# EAGLE board RefOsc10MHz_1V3 (EAGLE 7.2.0)
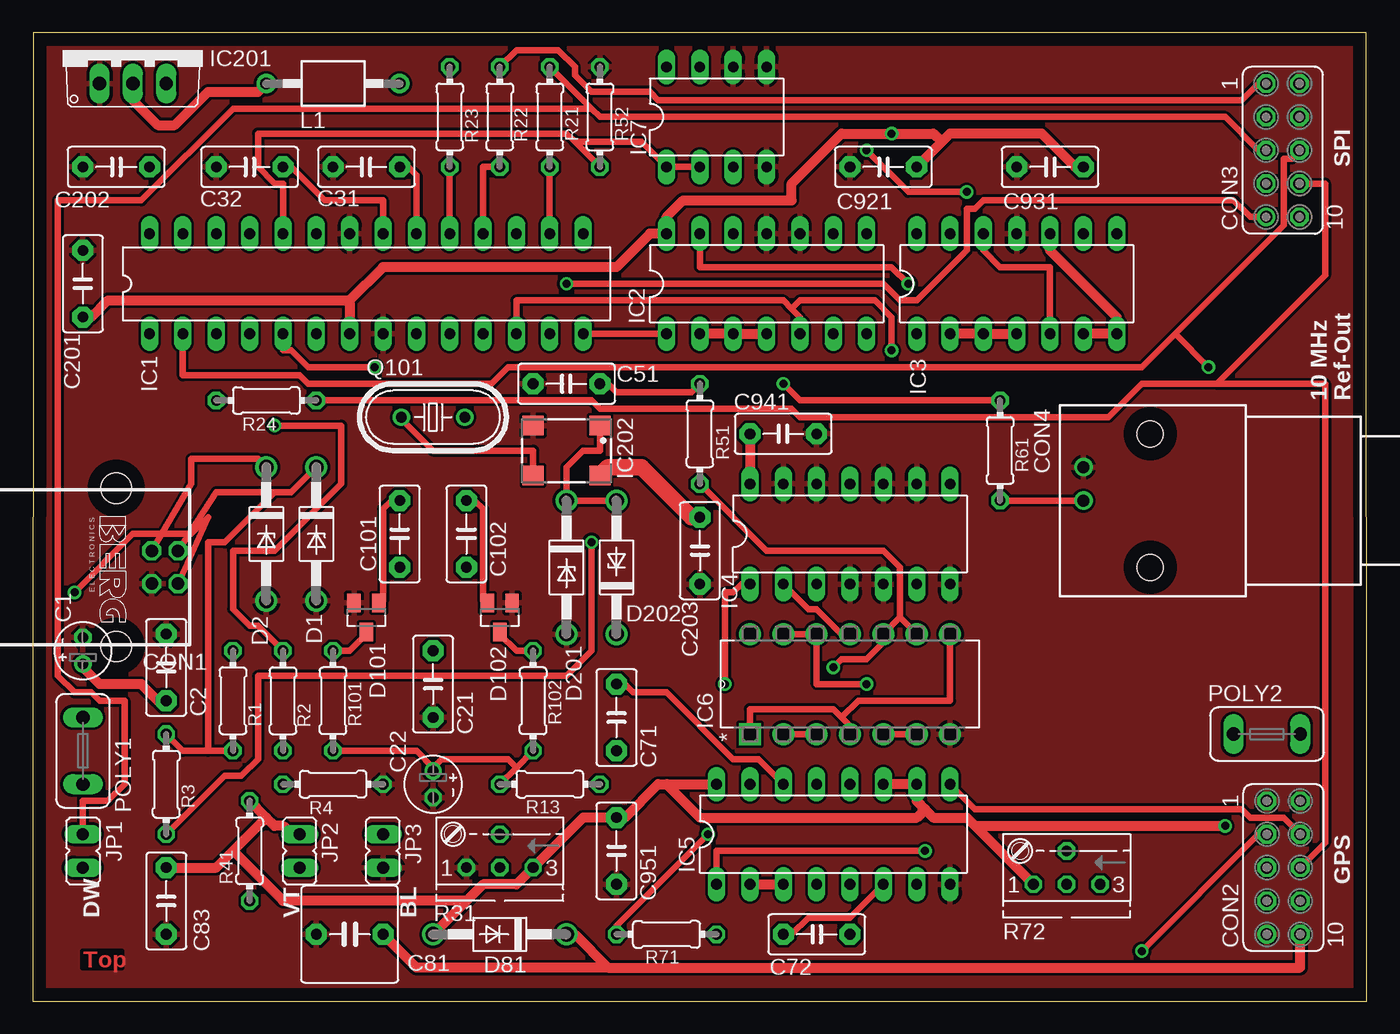
[diagram p0: board, top side]
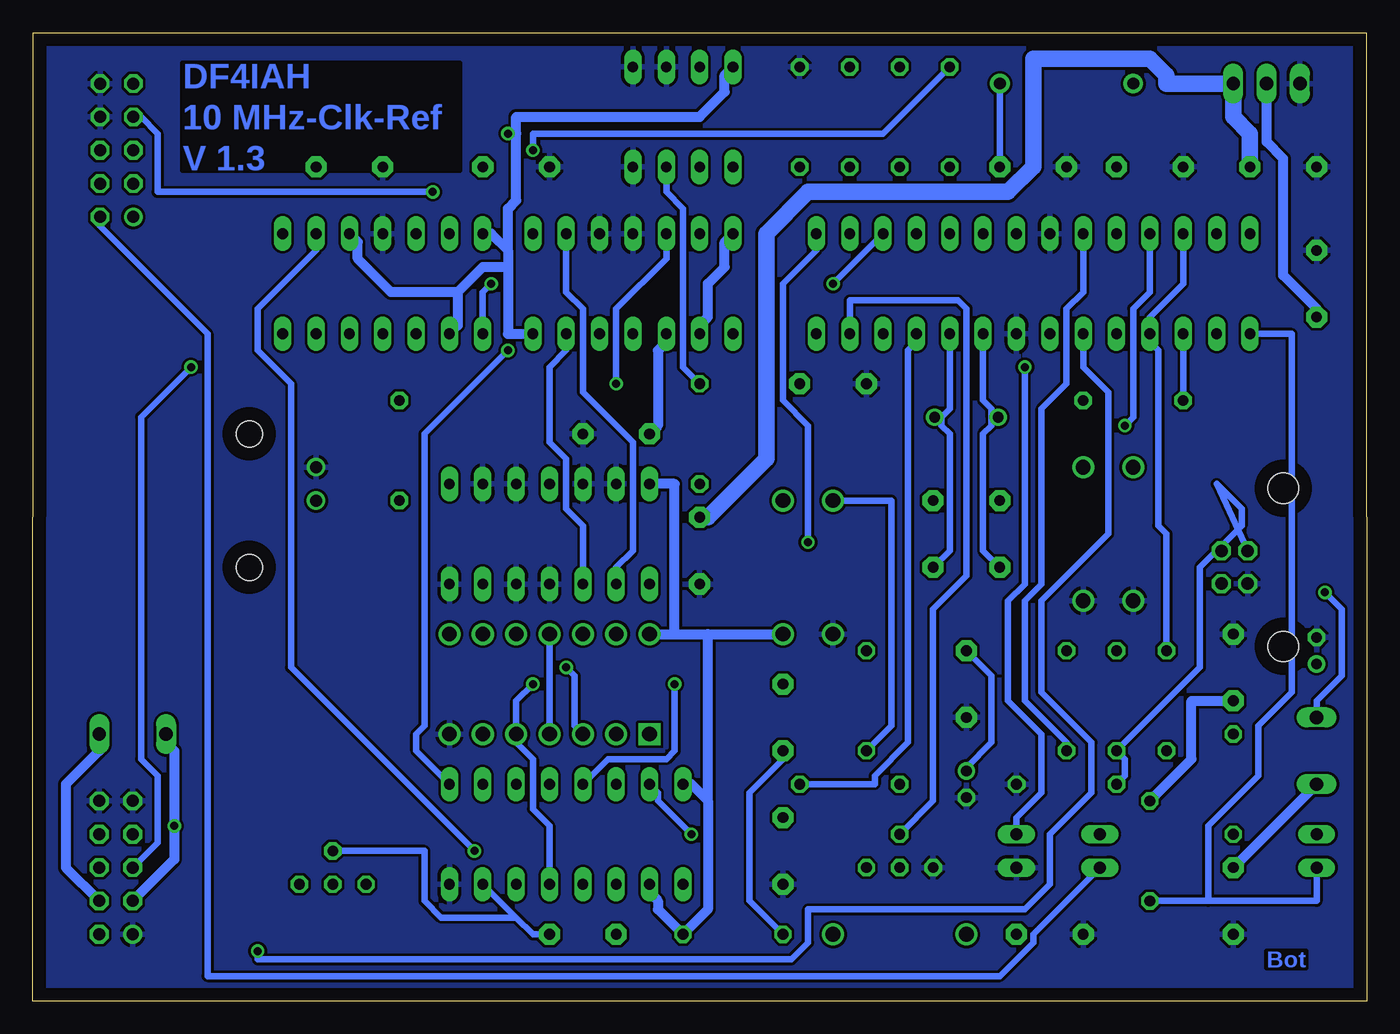
[diagram p1: board, bottom side, seen from below]

Size 101.58 x 73.71 mm. Coordinates in mm from the lower left corner, seen from the top.
Outline: 0,0 101.58,0 101.54,73.71 0.03,73.71 0,0
Copper layers (1*16): Top 0.035mm / dielectric 1.5mm / Bottom 0.035mm
Design rules "default *": minimum track width 20mil, minimum drill 24mil, track to track 8mil, track to pad 8mil, pad to pad 8mil, via to via 8mil, smd to smd 8mil, copper to edge 40mil, drill to drill 8mil, minimum pad ring 10mil, minimum via ring 8mil, stop-mask expansion 1mil, vias tented up to drill 0mil, thermal gap 10mil
Net classes: 1 N3V3: width 1.27 mm; 2 N5V: width 0.762 mm; 3 N0V: width 0.762 mm

## Footprints (pad centres in the part's own frame; a part is rotated, then mirrored left to right if it is on the bottom)
E2-4 = drill 0.813 pad 1.27: + -1.016,0 | drill 0.813 pad 1.27 octagon: - 1.016,0
C5B3 = drill 0.813 pad 1.6 octagon: 1 -2.54,0; 2 2.54,0
C5B7.2 = drill 0.813 pad 1.6 octagon: 1 -2.54,0; 2 2.54,0
PN61729 = drill 0.95 octagon: 1 1.25,4.71; 2 -1.25,4.71; 3 -1.25,2.71; 4 1.25,2.71 | hole 2.3: -6.02,0; 6.02,0
FE05-2 = drill 0.914: 1 -5.08,1.27 | drill 0.914 octagon: 2 -5.08,-1.27; 3 -2.54,1.27; 4 -2.54,-1.27; 5 0,1.27; 6 0,-1.27; 7 2.54,1.27; 8 2.54,-1.27; 9 5.08,1.27; 10 5.08,-1.27
AMP_227161 = drill 0.9 pad 1.27: 1 0,-5.08; 2 -2.54,-5.08 | hole 2: -5.08,0; 5.08,0
DO41Z10 = drill 1.118: A 5.08,0; C -5.08,0
DO41-10 = drill 1.118: A 5.08,0; C -5.08,0
SOT23 = smd 1 x 1.4: 1 -0.95,-1.1; 2 0.95,-1.1; 3 0,1.1
DIL28-3 = drill 0.813 long: 1 -16.51,-3.81; 2 -13.97,-3.81; 3 -11.43,-3.81; 4 -8.89,-3.81; 5 -6.35,-3.81; 6 -3.81,-3.81; 7 -1.27,-3.81; 8 1.27,-3.81; 9 3.81,-3.81; 10 6.35,-3.81; 11 8.89,-3.81; 12 11.43,-3.81; 13 13.97,-3.81; 14 16.51,-3.81; 15 16.51,3.81; 16 13.97,3.81; 17 11.43,3.81; 18 8.89,3.81; 19 6.35,3.81; 20 3.81,3.81; 21 1.27,3.81; 22 -1.27,3.81; 23 -3.81,3.81; 24 -6.35,3.81; 25 -8.89,3.81; 26 -11.43,3.81; 27 -13.97,3.81; 28 -16.51,3.81
DIL14 = drill 0.813 long: 1 -7.62,-3.81; 2 -5.08,-3.81; 3 -2.54,-3.81; 4 0,-3.81; 5 2.54,-3.81; 6 5.08,-3.81; 7 7.62,-3.81; 8 7.62,3.81; 9 5.08,3.81; 10 2.54,3.81; 11 0,3.81; 12 -2.54,3.81; 13 -5.08,3.81; 14 -7.62,3.81
DIL16 = drill 0.813 long: 1 -8.89,-3.81; 2 -6.35,-3.81; 3 -3.81,-3.81; 4 -1.27,-3.81; 5 1.27,-3.81; 6 3.81,-3.81; 7 6.35,-3.81; 8 8.89,-3.81; 9 8.89,3.81; 10 6.35,3.81; 11 3.81,3.81; 12 1.27,3.81; 13 -1.27,3.81; 14 -3.81,3.81; 15 -6.35,3.81; 16 -8.89,3.81
DIP254P762X508-14 = drill 1.118 square: 1 -7.62,15.24 | drill 1.118: 2 -7.62,12.7; 3 -7.62,10.16; 4 -7.62,7.62; 5 -7.62,5.08; 6 -7.62,2.54; 7 -7.62,0; 8 0,0; 9 0,2.54; 10 0,5.08; 11 0,7.62; 12 0,10.16; 13 0,12.7; 14 0,15.24
DIL08 = drill 0.813 long: 1 -3.81,-3.81; 2 -1.27,-3.81; 3 1.27,-3.81; 4 3.81,-3.81; 5 3.81,3.81; 6 1.27,3.81; 7 -1.27,3.81; 8 -3.81,3.81
TO220V = drill 1.016 long: 1 -2.54,-2.54; 2 0,-2.54; 3 2.54,-2.54
SM77H = smd 1.6 x 1.5: 1 -2.55,-1.9; 2 2.55,-1.9; 3 2.55,1.9; 4 -2.55,1.9
JP1 = drill 0.914 long: 1 0,-1.27; 2 0,1.27
BL01RN1A = drill 0.9 pad 1.5: 1 -5.08,0; 2 5.08,0
TE5 = drill 1.016 long: 1 -2.54,0; 2 2.54,0
HC49U70 = drill 0.813: 1 -2.413,0; 2 2.413,0
0204/7 = drill 0.813 octagon: 1 -3.81,0; 2 3.81,0
S64YW = drill 0.813 octagon: A 2.54,1.27; E -2.54,1.27; S 0,-1.27; S@1 0,1.27

## Placement (x,y rotation side)
C1  47mu  [E2-4]  3.81,26.67 90 top
C2  100n  [C5B3]  10.16,25.4 90 top
C21  100p  [C5B3]  30.48,24.13 270 top
C22  10mu  [E2-4]  30.48,16.51 270 top
C31  100n  [C5B3]  25.4,63.5 180 top
C32  100p  [C5B3]  16.51,63.5 0 top
C51  10n  [C5B3]  40.64,46.99 180 top
C71  10p  [C5B3]  44.45,21.59 270 top
C72  33p  [C5B3]  59.69,5.08 0 top
C81  0.22F  [C5B7.2]  24.13,5.08 180 top
C83  10n  [C5B3]  10.16,7.62 270 top
C101  68p  [C5B3]  27.94,35.56 90 top
C102  68p  [C5B3]  33.02,35.56 90 top
C201  100n  [C5B3]  3.81,54.61 270 top
C202  100n  [C5B3]  6.35,63.5 0 top
C203  100n  [C5B3]  50.8,34.29 90 top
C921  10n  [C5B3]  64.77,63.5 0 top
C931  10n  [C5B3]  77.47,63.5 0 top
C941  10n  [C5B3]  57.15,43.18 180 top
C951  10n  [C5B3]  44.45,11.43 90 top
CON1  [PN61729]  6.35,33.02 270 top
CON2  [FE05-2]  95.25,10.16 90 top
CON3  [FE05-2]  95.2,64.77 90 top
CON4  1-227161-0  [AMP_227161]  85.09,38.1 270 top
D1  ZF 3.6  [DO41Z10]  21.59,35.56 270 top
D2  ZF 3.6  [DO41Z10]  17.78,35.56 270 top
D81  1N5819  [DO41-10]  35.56,5.08 180 top
D101  BB201  [SOT23]  25.4,29.21 180 top
D102  BB201  [SOT23]  35.56,29.21 180 top
D201  ZF 2.7  [DO41Z10]  40.64,33.02 270 top
D202  ZF 2.7  [DO41Z10]  44.45,33.02 90 top
IC1  ATmega328-P  [DIL28-3]  25.4,54.61 0 top
IC2  74HCT73N  [DIL14]  55.88,54.61 0 top
IC3  74HCT73N  [DIL14]  74.93,54.61 0 top
IC4  74HCT00N  [DIL14]  62.23,35.56 0 top
IC5  74LS221N  [DIL16]  60.96,12.7 0 top
IC6  CD4066BE  [DIP254P762X508-14]  69.85,27.94 90 top
IC7  LCM6062IN  [DIL08]  52.07,67.31 0 top
IC201  LD10853.3  [TO220V]  7.62,72.39 0 top
IC202  CFPT-126  [SM77H]  40.64,41.91 180 top
JP1  [JP1]  3.81,11.43 0 top
JP2  [JP1]  20.32,11.43 180 top
JP3  [JP1]  26.67,11.43 180 top
L1  10mu  [BL01RN1A]  22.86,69.85 0 top
POLY1  0.5A  [TE5]  3.81,19.05 270 top
POLY2  0.1A  [TE5]  93.98,20.32 180 top
Q101  20MHz  [HC49U70]  30.48,44.45 0 top
R1  68R  [0204/7]  15.24,22.86 270 top
R2  68R  [0204/7]  19.05,22.86 270 top
R3  1k5  [0204/7]  10.16,16.51 270 top
R4  1M  [0204/7]  22.86,16.51 180 top
R13  15k  [0204/7]  39.37,16.51 180 top
R21  2k7  [0204/7]  39.37,67.31 270 top
R22  2k7  [0204/7]  35.56,67.31 270 top
R23  2k7  [0204/7]  31.75,67.31 270 top
R24  2k7  [0204/7]  17.78,45.72 180 top
R31  47k  [S64YW]  35.56,11.43 180 top
R41  12k  [0204/7]  16.51,11.43 90 top
R51  1k  [0204/7]  50.8,43.18 270 top
R52  1k  [0204/7]  43.18,67.31 270 top
R61  50R  [0204/7]  73.66,41.91 270 top
R71  1.5k  [0204/7]  48.26,5.08 0 top
R72  10k  [S64YW]  78.74,10.16 180 top
R101  1M  [0204/7]  22.86,22.86 90 top
R102  1M  [0204/7]  38.1,22.86 90 top

## Library data of the parts
C1 C22 = rcl
C2 C21 C31 C32 C51 C71 C72 C81 C83 C101 C102 C201-C203 C921 C931 C941 C951 = capacitor-wima
CON1 = con-berg; OC_FARNELL: unknown; OC_NEWARK: unknown
CON2 CON3 = con-lsta; OC_FARNELL: unknown; OC_NEWARK: unknown
CON4 = con-coax; MF: TYCO ELECTRONICS; MPN: 1-227161; OC_FARNELL: unknown; OC_NEWARK: 33B3200
D1 D2 D81 D101 D102 D201 D202 = diode
IC1 = atmel; OC_FARNELL: unknown; OC_NEWARK: unknown
IC2 IC3 IC5 = 74xx-eu
IC4 = 74ttl-din
IC6 = Texas Instruments_By_element14_Batch_1; MPN: CD4066BE; OC_FARNELL: 1106112; OC_NEWARK: 60K5124; PACKAGE: PDIP-14; SUPPLIER: Texas Instruments
IC7 = lmc6082n; OC_FARNELL: unknown; OC_NEWARK: 41K2618
IC201 = linear
IC202 = crystal
JP1-JP3 = jumper
L1 = inductors
POLY1 POLY2 = fuse; OC_FARNELL: unknown; OC_NEWARK: unknown
Q101 = crystal; OC_FARNELL: unknown; OC_NEWARK: unknown
R1-R4 R13 R21-R24 R41 R51 R52 R61 R71 R101 R102 = resistor
R31 R72 = pot

## Nets
GND [N0V]: C1.- C2.2 C21.2 C22.- C31.2 C32.1 C51.2 C81.2 C83.2 C201.1 C202.1 C203.1 C921.1 C931.1 C941.1 C951.1 CON1.4 CON2.1 CON2.9 CON2.10 CON3.8 CON3.10 CON4.2 D1.A D2.A D101.2 D102.1 D201.A IC1.8 IC1.22 IC2.10 IC2.11 IC3.11 IC4.4 IC4.5 IC4.7 IC4.9 IC4.10 IC4.12 IC4.13 IC5.8 IC6.7 IC7.4 IC7.5 IC7.6 IC201.1 IC202.2 JP3.2 R4.1 R31.A R52.1
N3V3 [N3V3]: C202.2 C203.2 IC201.3 IC202.4
N$1: C101.1 IC1.9 IC202.3 Q101.1
N$2: C102.1 IC1.10 Q101.2
N$3: D102.3 R102.2
N$4: C101.2 D101.1
N$5: C21.1 C22.+ D201.C D202.A IC1.23 IC202.1 R13.2 R101.1 R102.1
N$6: CON1.2 D1.C R1.2 R3.1
N$7: CON1.3 D2.C R2.2 R4.2
N$8: IC1.4 IC1.26 R1.1
N$9: IC1.25 R2.1
N$10: IC1.16 R21.2
N$11: CON3.1 IC1.17
N$12: IC1.19 R23.2
N$13: C31.1 IC1.20 L1.2
N$14: IC1.18 R22.2
N$15: CON3.5 JP1.2 R21.1
N$16: CON3.9 R22.1
N$17: CON3.7 R23.1
N$18: IC1.3 R24.2
N$19: IC1.14 IC2.1
N$20: CON2.5 CON3.6 IC1.2
N$21: CON2.6 CON3.4 R24.1
N$22: IC1.1 JP1.1 R41.1
N$23: CON3.2 JP2.2
N$24: CON2.8 IC1.12 IC2.5 IC5.9
N$25: IC1.13 R31.S
N$26: IC1.11 R13.1
N$27: C32.2 IC1.21
N$28: IC1.5 JP3.1
N$29: C102.2 D102.2
N$30: D101.3 R101.2
N$31: IC2.12 R61.1
N$32: IC2.9 IC4.2 IC6.1 IC6.4 IC6.8 IC6.11
N$33: IC6.2 IC6.3 IC6.9 IC6.10 R51.2
N$34: C51.1 IC7.3 R51.1
N$35: IC2.6 IC4.3
N$36: IC5.5 IC6.5 IC6.6 IC6.12 IC6.13
N$37: IC1.24 IC7.1 IC7.2 R52.2
N$38: CON1.1 POLY1.1
N$39 [N5V]: CON2.4 POLY2.1
N$40: CON2.7 IC1.6
N$41: IC1.15 R3.2
N$42: CON4.1 R61.2
N$43: IC4.1 IC5.13
N$44: C72.2 IC5.7 R72.S
N$45: C72.1 IC5.6
N$46: IC3.9 IC5.1
N$47: C71.2 IC5.15 R71.1
N$48: C71.1 IC5.14
N$49: IC2.13 IC3.1
N$50: IC3.5 IC3.12
N$51 [N0V]: C81.1 CON2.2 D81.C
VCC [N5V]: C1.+ C2.1 C83.1 C201.2 C921.2 C931.2 C941.2 C951.2 CON2.3 D81.A D202.C IC1.7 IC2.2 IC2.3 IC2.4 IC2.7 IC2.14 IC3.2 IC3.3 IC3.4 IC3.6 IC3.7 IC3.10 IC3.14 IC4.14 IC5.2 IC5.3 IC5.10 IC5.11 IC5.16 IC6.14 IC7.8 IC201.2 JP2.1 L1.1 POLY1.2 POLY2.2 R31.E R41.2 R71.2 R72.A

## Tracks (layer width: path | path; a pad name or v marks a point on that pad's centre or on a via)
GND
  pour Bottom: 0,73.66 101.6,73.66 101.6,0 0,0
  pour Top: 0,73.66 101.6,73.66 101.6,0 0,0
N3V3
  Top 1.27: C203.2 50.16,36.83 46.35,40.64 43.81,40.64 IC202.4
  Bottom 1.27: C202.2 8.89,66.04 10.16,67.31 IC201.3 15.24,69.85 15.24,70.48 16.51,71.75 25.4,71.75 25.4,63.5 27.3,61.59 42.55,61.59 45.72,58.42 45.72,41.27 50.16,36.83 C203.2
N$1
  Top 0.508: IC202.3 38.1,40.64 38.1,41.91 30.48,41.91 27.94,44.45 Q101.1
  Bottom 0.508: IC1.9 29.21,45.72 28.57,45.09 28.57,44.45 | C101.1 29.21,34.29 29.21,43.18 28.57,43.81 28.57,44.45 | 28.57,44.45 Q101.1
N$2
  Bottom 0.508: 32.38,44.45 31.75,45.09 IC1.10 | C102.1 31.75,34.29 31.75,43.18 32.38,43.81 32.38,44.45 | 32.38,44.45 Q101.2
N$3
  Top 0.508: R102.2 36.83,26.67 35.56,27.94 D102.3
N$4
  Top 0.508: C101.2 27.3,38.1 26.67,37.47 26.67,30.48 D101.1
N$5
  Top 0.508: IC202.1 43.18,43.18 43.18,41.91 41.91,41.91 40.64,40.64 D201.C D202.A | R102.1 36.83,17.78 | 36.83,17.78 R13.2 | 30.48,17.78 31.11,18.41 36.2,18.41 36.83,17.78 | 30.48,17.78 29.21,19.05 R101.1 | 30.48,17.78 C22.+
  Bottom 0.508: C21.1 28.57,24.77 28.57,19.68 30.48,17.78 C22.+ | D201.C 36.2,38.1 36.2,20.95 R102.1 | IC1.23 21.59,53.98 22.86,52.7 22.86,46.99 24.77,45.09 24.77,31.75 26.04,30.48 26.04,22.86 22.86,19.68 R101.1
N$6
  Top 0.508: R3.1 11.43,19.05 13.34,19.05 | R1.2 13.34,19.05 | 18.41,38.73 19.68,38.73 D1.C | 18.41,38.73 13.97,38.73 CON1.2 | 13.34,19.05 13.34,34.92 14.61,34.92 18.41,38.73
N$7
  Top 0.508: D2.C 17.14,41.27 12.06,41.27 12.06,39.37 CON1.3
  Bottom 0.508: R4.2 18.41,17.14 18.41,18.41 R2.2 12.7,25.4 12.7,33.02 9.53,36.2 9.53,37.47 11.43,39.37 CON1.3
N$8
  Bottom 0.508: R1.1 15.24,35.56 15.88,36.2 15.88,49.53 16.51,50.16 IC1.4 16.51,52.07 13.97,54.61 IC1.26
N$9  (via drill 0.61)
  Top 0.508: R2.1 17.14,28.57 16.51,28.57 15.24,29.84 15.24,34.29 18.41,34.29 23.5,39.37 23.5,43.81 v18.41,43.81
  Bottom 0.508: v18.41,43.81 17.78,44.45 17.78,52.7 16.51,53.98 IC1.25
N$10
  Top 0.508: R21.2 IC1.16
N$11  (via drill 0.61)
  Top 0.508: v40.64,54.61 64.77,54.61 66.04,53.34 67.31,53.34 71.12,57.15 71.12,60.33 71.75,60.33 72.39,60.96 91.44,60.96 92.71,59.69 CON3.1
  Bottom 0.508: v40.64,54.61 IC1.17
N$12
  Top 0.508: R23.2 IC1.19
N$13
  Top 0.508: IC1.20 29.21,62.87 28.57,63.5 C31.1
  Bottom 0.508: C31.1 L1.2
N$14
  Top 0.508: IC1.18 34.29,63.5 R22.2
N$15
  Top 0.508: 42.55,67.94 43.18,67.31 90.81,67.31 93.34,64.77 CON3.5 | 42.55,67.94 R21.1 | JP1.2 3.81,15.24 5.71,15.24 6.99,16.51 6.99,22.86 5.08,22.86 4.45,23.5 3.17,23.5 1.91,24.77 1.91,60.96 8.26,60.96 15.24,67.94 42.55,67.94
N$16
  Top 0.508: R22.1 36.83,72.39 40.01,72.39 41.27,71.12 41.27,70.48 42.55,69.22 46.99,69.22 47.62,68.58 92.08,68.58 93.34,69.85 CON3.9
N$17  (via drill 0.61)
  Top 0.508: v63.5,64.77 66.67,61.59 v71.12,61.59
  Bottom 0.508: R23.1 36.83,66.04 63.5,66.04 v63.5,64.77 | v71.12,61.59 92.08,61.59 92.08,66.04 93.34,67.31 CON3.7
N$18
  Bottom 0.508: IC1.3 R24.2
N$19
  Top 0.508: IC2.1 IC1.14
N$20  (via drill 0.61)
  Top 0.508: IC1.2 11.43,47.62 20.32,47.62 20.95,46.99 34.92,46.99 36.2,48.26 84.45,48.26 87,50.8 | 87,50.8 95.25,59.05 95.25,64.14 95.89,64.14 96.52,64.77 CON3.6 | 87,50.8 v89.53,48.26
  Bottom 0.508: CON2.5 92.08,12.06 92.08,17.14 93.34,18.41 93.34,44.45 v89.53,48.26
N$21
  Top 0.508: R24.1 42.55,45.72 43.18,45.09 57.78,45.09 58.42,44.45 81.92,44.45 84.45,46.99 90.17,46.99 | 90.17,46.99 98.42,55.24 98.42,62.23 CON3.4 | CON2.6 98.42,12.06 98.42,46.99 90.17,46.99
N$22
  Bottom 0.508: 12.06,7.62 3.81,7.62 JP1.1 | 12.06,7.62 R41.1 | IC1.1 5.71,50.8 5.71,23.5 8.26,20.95 8.26,17.14 12.06,13.34 12.06,7.62
N$23
  Bottom 0.508: JP2.2 25.4,5.08 25.4,4.45 27.94,1.91 88.27,1.91 88.27,50.8 96.52,59.05 96.52,59.69 CON3.2
N$24  (via drill 0.61)
  Top 0.508: IC1.12 36.83,53.34 57.15,53.34 57.78,52.7 | 57.78,52.7 58.42,52.07 IC2.5 | IC5.9 71.75,14.61 92.08,14.61 92.71,13.97 95.25,13.97 CON2.8 | 57.78,52.7 58.42,53.34 64.14,53.34 65.41,52.07 v65.41,49.53
  Bottom 0.508: v65.41,49.53 71.75,43.18 71.75,20.95 72.39,20.32 72.39,19.05 IC5.9
N$25
  Bottom 0.508: R31.S 33.02,15.24 33.02,29.84 30.48,32.38 30.48,52.7 31.11,53.34 39.37,53.34 IC1.13
N$26
  Bottom 0.508: R13.1 37.47,16.51 37.47,17.14 34.92,19.68 34.92,49.53 34.29,50.16 IC1.11
N$27
  Top 0.508: IC1.21 26.67,60.96 22.23,60.96 19.68,63.5 C32.2
N$28  (via drill 0.61)
  Top 0.508: IC1.5 19.05,49.53 19.68,49.53 20.95,48.26 v26.04,48.26
  Bottom 0.508: v26.04,48.26 26.04,31.75 27.3,30.48 27.3,22.86 24.77,20.32 24.77,15.88 26.67,13.97 JP3.1
N$29
  Top 0.508: C102.2 33.66,38.1 34.29,37.47 34.29,30.48 D102.2
N$30
  Top 0.508: R101.2 24.13,26.67 25.4,27.94 D101.3
N$31  (via drill 0.61)
  Top 0.508: v57.15,46.99 58.42,45.72 R61.1
  Bottom 0.508: IC2.12 53.34,56.52 57.15,52.7 v57.15,46.99
N$32
  Top 0.508: IC6.1 54.61,22.23 60.96,22.23 61.59,21.59 | 61.59,21.59 62.23,20.95 IC6.4 | IC6.8 69.85,22.86 62.87,22.86 61.59,21.59 | IC4.2 59.05,29.84 59.69,29.84 61.59,27.94 IC6.11
  Bottom 0.508: IC2.9 60.96,53.98 59.69,52.7 59.69,46.35 55.88,42.55 55.88,34.29 57.15,33.02 IC4.2 | IC6.11 IC6.4
N$33  (via drill 0.61)
  Top 0.508: IC6.3 IC6.2 | R51.2 55.88,34.29 64.77,34.29 66.04,33.02 66.04,29.21 | 66.04,29.21 IC6.10 64.77,27.3 63.5,26.04 61.59,26.04 v60.96,25.4 | 66.04,29.21 IC6.9
  Bottom 0.508: IC6.3 60.33,20.95 60.33,24.77 v60.96,25.4
N$34
  Top 0.508: R51.1 50.16,46.35 44.45,46.35 43.81,46.99 C51.1
  Bottom 0.508: IC7.3 53.34,61.59 52.07,60.33 52.07,48.26 R51.1
N$35
  Bottom 0.508: IC4.3 59.69,36.2 60.96,37.47 60.96,41.27 62.23,42.55 62.23,48.26 60.96,49.53 IC2.6
N$36  (via drill 0.61)
  Top 0.508: IC6.13 IC6.12 59.69,24.13 v63.5,24.13 | IC6.5 IC6.6
  Bottom 0.508: IC5.5 62.23,13.34 63.5,14.61 63.5,18.41 64.77,19.68 IC6.5 64.77,22.86 v63.5,24.13
N$37
  Top 0.508: IC7.2 IC7.1 46.35,65.41 41.27,65.41 | IC1.24 19.05,62.23 18.41,62.23 17.14,63.5 17.14,66.04 40.64,66.04 41.27,65.41 | R52.2 41.27,65.41
N$38  (via drill 0.61)
  Top 0.508: v3.17,31.11 7.62,35.56 12.06,35.56 13.34,36.83 CON1.1
  Bottom 0.508: v3.17,31.11 1.91,29.84 1.91,24.77 3.81,22.86 POLY1.1
N$39
  Bottom 0.762: CON2.4 99.06,10.16 99.06,16.51 96.52,19.05 POLY2.1
N$40  (via drill 0.61)
  Top 0.508: v84.45,3.81 93.34,12.7 CON2.7
  Bottom 0.508: IC1.6 21.59,48.26 19.68,46.35 19.68,35.56 24.77,30.48 24.77,23.5 20.95,19.68 20.95,15.88 24.13,12.7 24.13,8.89 26.04,6.99 42.55,6.99 42.55,4.45 43.81,3.17 84.45,3.17 v84.45,3.81
N$41  (via drill 0.61)
  Top 0.508: R3.2 14.61,17.14 15.88,17.14 17.14,18.41 17.14,24.77 40.64,24.77 42.55,26.67 v42.55,34.92
  Bottom 0.508: v42.55,34.92 42.55,43.81 44.45,45.72 44.45,54.61 41.91,57.15 IC1.15
N$42
  Top 0.508: CON4.1 R61.2
N$43  (via drill 0.61)
  Top 0.508: v52.7,24.13 52.7,31.11 53.34,31.11 53.98,31.75 IC4.1
  Bottom 0.508: IC5.13 57.78,18.41 53.34,18.41 52.7,19.05 v52.7,24.13
N$44
  Bottom 0.508: 64.77,6.35 63.5,5.08 C72.2 | 64.77,6.35 IC5.7 | R72.S 71.75,11.43 71.75,7.62 70.48,6.35 64.77,6.35
N$45
  Top 0.508: IC5.6 62.23,6.35 59.05,6.35 57.78,5.08 C72.1
N$46  (via drill 0.61)
  Top 0.508: IC5.1 52.07,11.43 v67.94,11.43
  Bottom 0.508: v67.94,11.43 81.92,25.4 81.92,46.99 84.45,49.53 84.45,52.7 80.01,57.15 IC3.9
N$47  (via drill 0.61)
  Top 0.508: v51.44,12.7 44.45,5.71 R71.1
  Bottom 0.508: R71.1 46.99,7.62 46.99,15.88 44.45,18.41 C71.2 | IC5.15 53.98,15.88 53.98,15.24 v51.44,12.7
N$48
  Top 0.508: IC5.14 55.24,18.41 53.34,18.41 48.26,23.5 45.72,23.5 45.09,24.13 C71.1
N$49  (via drill 0.61)
  Top 0.508: IC2.13 50.8,55.88 65.41,55.88 v66.67,54.61
  Bottom 0.508: v66.67,54.61 67.31,53.98 IC3.1
N$50
  Top 0.508: IC3.5 77.47,55.88 73.66,55.88 72.39,57.15 IC3.12
N$51
  Top 0.762: CON2.2 96.52,2.54 43.81,2.54 | 43.81,2.54 41.27,5.08 D81.C | C81.1 29.21,2.54 43.81,2.54
VCC  (via drill 0.61)
  Top 0.762: 69.22,65.41 69.85,66.04 76.83,66.04 79.38,63.5 C931.2 | 69.22,65.41 C921.2 | IC3.10 77.47,57.15 82.55,52.07 IC3.7 IC3.6 | IC3.2 IC3.3 IC3.4 | 69.22,65.41 68.58,66.04 v65.41,66.04 61.59,66.04 57.78,62.23 57.78,60.96 49.53,60.96 48.26,59.69 IC2.14 46.99,58.42 44.45,55.88 26.67,55.88 24.13,53.34 | IC5.11 IC5.10 67.31,15.24 67.94,14.61 | 71.75,13.34 71.12,13.97 68.58,13.97 67.94,14.61 | 71.75,13.34 R72.A | 71.75,13.34 v90.81,13.34 | L1.1 17.14,69.22 13.34,69.22 10.79,66.67 9.53,66.67 7.62,68.58 IC201.2 | 24.13,53.34 IC1.7 | 24.13,53.34 5.71,53.34 4.45,52.07 C201.2 | C2.1 9.53,22.86 8.26,24.13 5.08,24.13 3.81,25.4 C1.+ | 17.78,13.97 18.41,13.34 19.05,13.34 19.68,12.7 JP2.1 | 17.78,13.97 R41.2 | 15.24,11.43 13.97,10.16 C83.1 | 15.24,11.43 17.78,13.97 | C941.2 IC4.14 | IC2.2 IC2.3 IC2.4 | IC5.2 IC5.3 | 48.26,16.51 47.62,16.51 45.09,13.97 C951.2 41.91,13.97 R31.E 36.83,8.89 34.29,8.89 33.02,7.62 | 48.26,16.51 IC5.16 | 33.02,7.62 D81.A | 15.24,11.43 19.05,7.62 33.02,7.62 | 67.94,14.61 67.31,13.97 50.8,13.97 48.26,16.51
  Bottom 0.762: IC2.7 65.41,50.8 65.41,55.88 | 65.41,57.15 65.41,55.88 | 65.41,57.15 66.67,58.42 IC3.14 | IC7.8 48.9,70.48 48.9,69.22 50.8,67.31 64.77,67.31 64.77,66.04 | 64.77,66.04 64.77,60.96 65.41,60.33 65.41,57.15 | IC3.2 69.22,51.44 69.22,53.98 | 69.22,53.98 67.31,55.88 65.41,55.88 | IC3.10 76.83,57.78 76.83,56.52 74.3,53.98 69.22,53.98 | 64.77,66.04 v65.41,66.04 | CON2.3 90.81,10.79 v90.81,13.34 90.81,19.05 91.44,19.68 POLY2.2 | IC201.2 7.62,65.41 6.35,64.14 6.35,55.24 3.81,52.7 C201.2 | C83.1 POLY1.2 | C2.1 13.34,22.86 13.34,18.41 R41.2 | IC2.14 48.9,57.78 48.9,55.88 50.16,54.61 50.16,52.07 50.8,51.44 IC2.2 | C941.2 53.98,43.81 53.98,49.53 53.34,50.16 IC2.3 | IC6.14 52.7,27.94 | 52.7,27.94 50.16,27.94 | 50.16,27.94 D202.C | IC5.2 54.61,8.26 53.98,7.62 53.98,6.99 R71.2 50.16,6.99 50.16,15.24 | 50.16,15.24 51.44,16.51 IC5.16 | 50.16,15.24 50.16,27.94 | IC4.14 52.7,39.37 52.7,27.94

## Text on the board
Top: Top
Bottom: DF4IAH / 10 MHz-Clk-Ref / V 1.3 | Bot
tPlace: SPI | 10 MHz / Ref-Out | GPS | DW | VT | BL